# Altium PCB PCB_size.PcbDoc
Units mm, origin at the board's own origin, x right, y up, seen from the top; angles counter-clockwise.
Board outline 90.2 x 60.2 mm, 2 copper layers (Top Layer, Bottom Layer); 4 components, 0 nets, 4 pads, 0 vias.
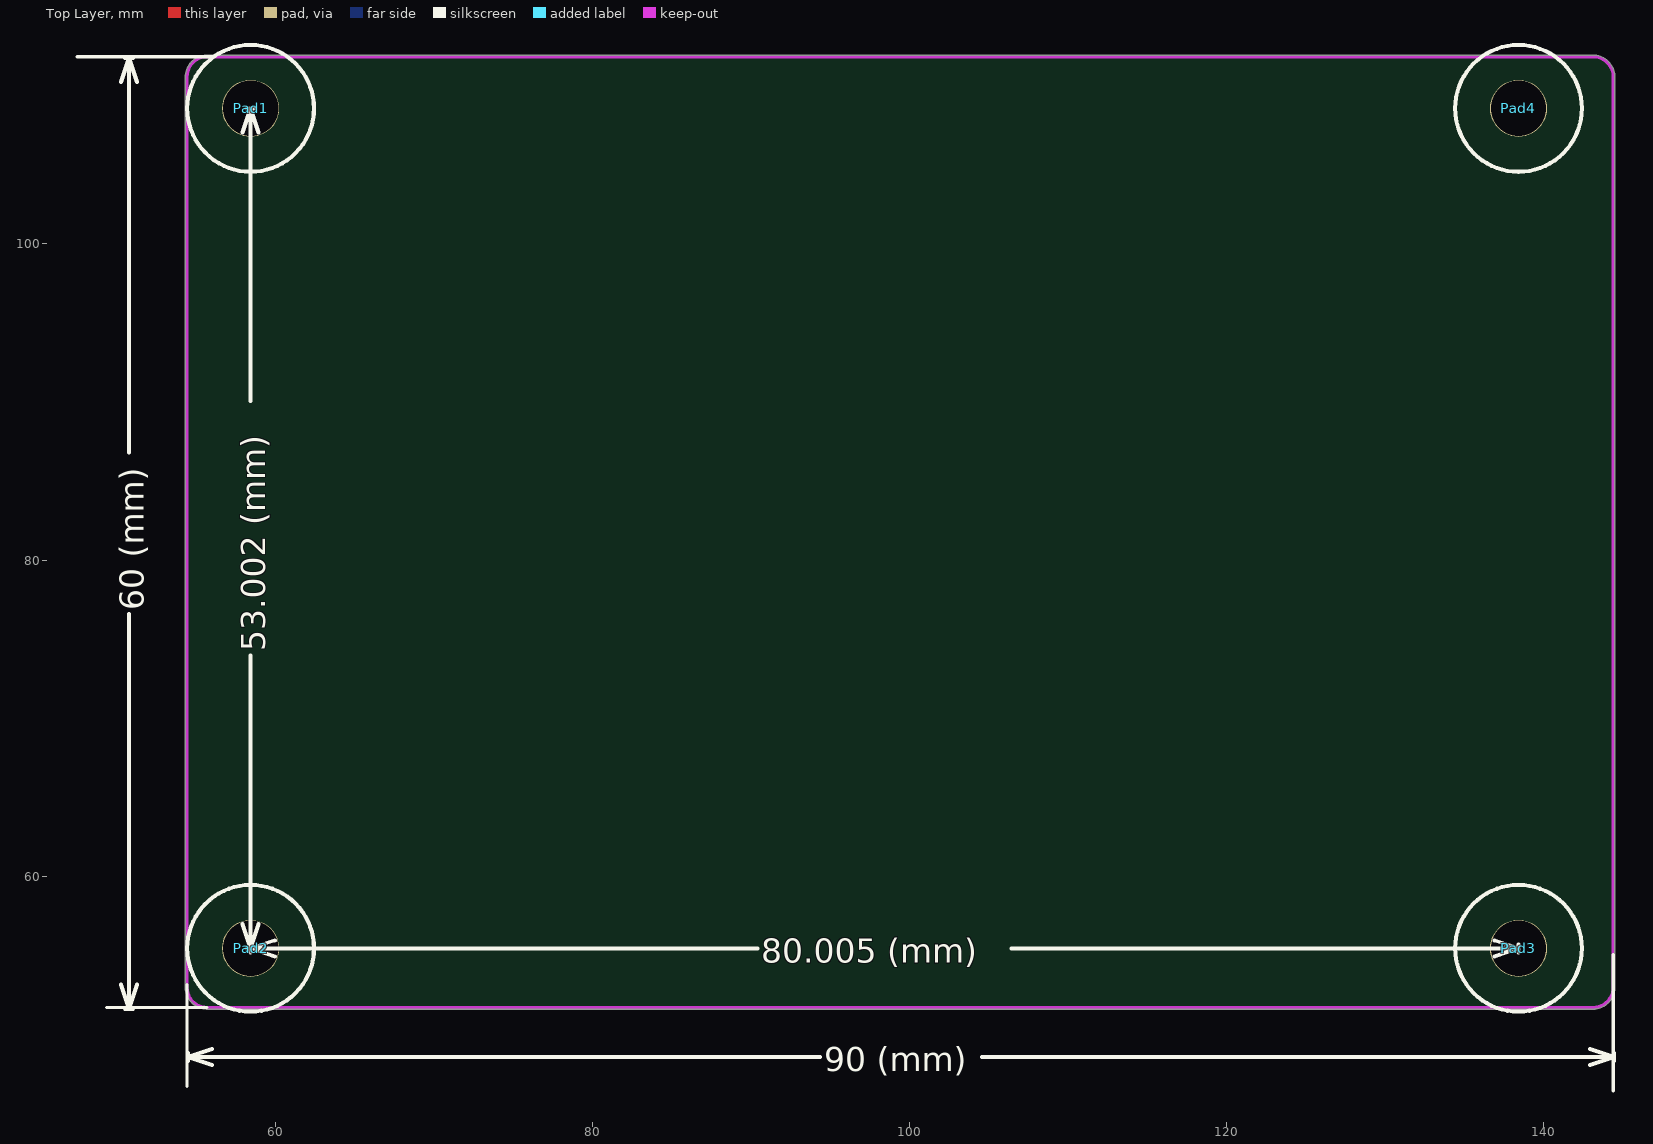
[diagram p0: Top Layer view]
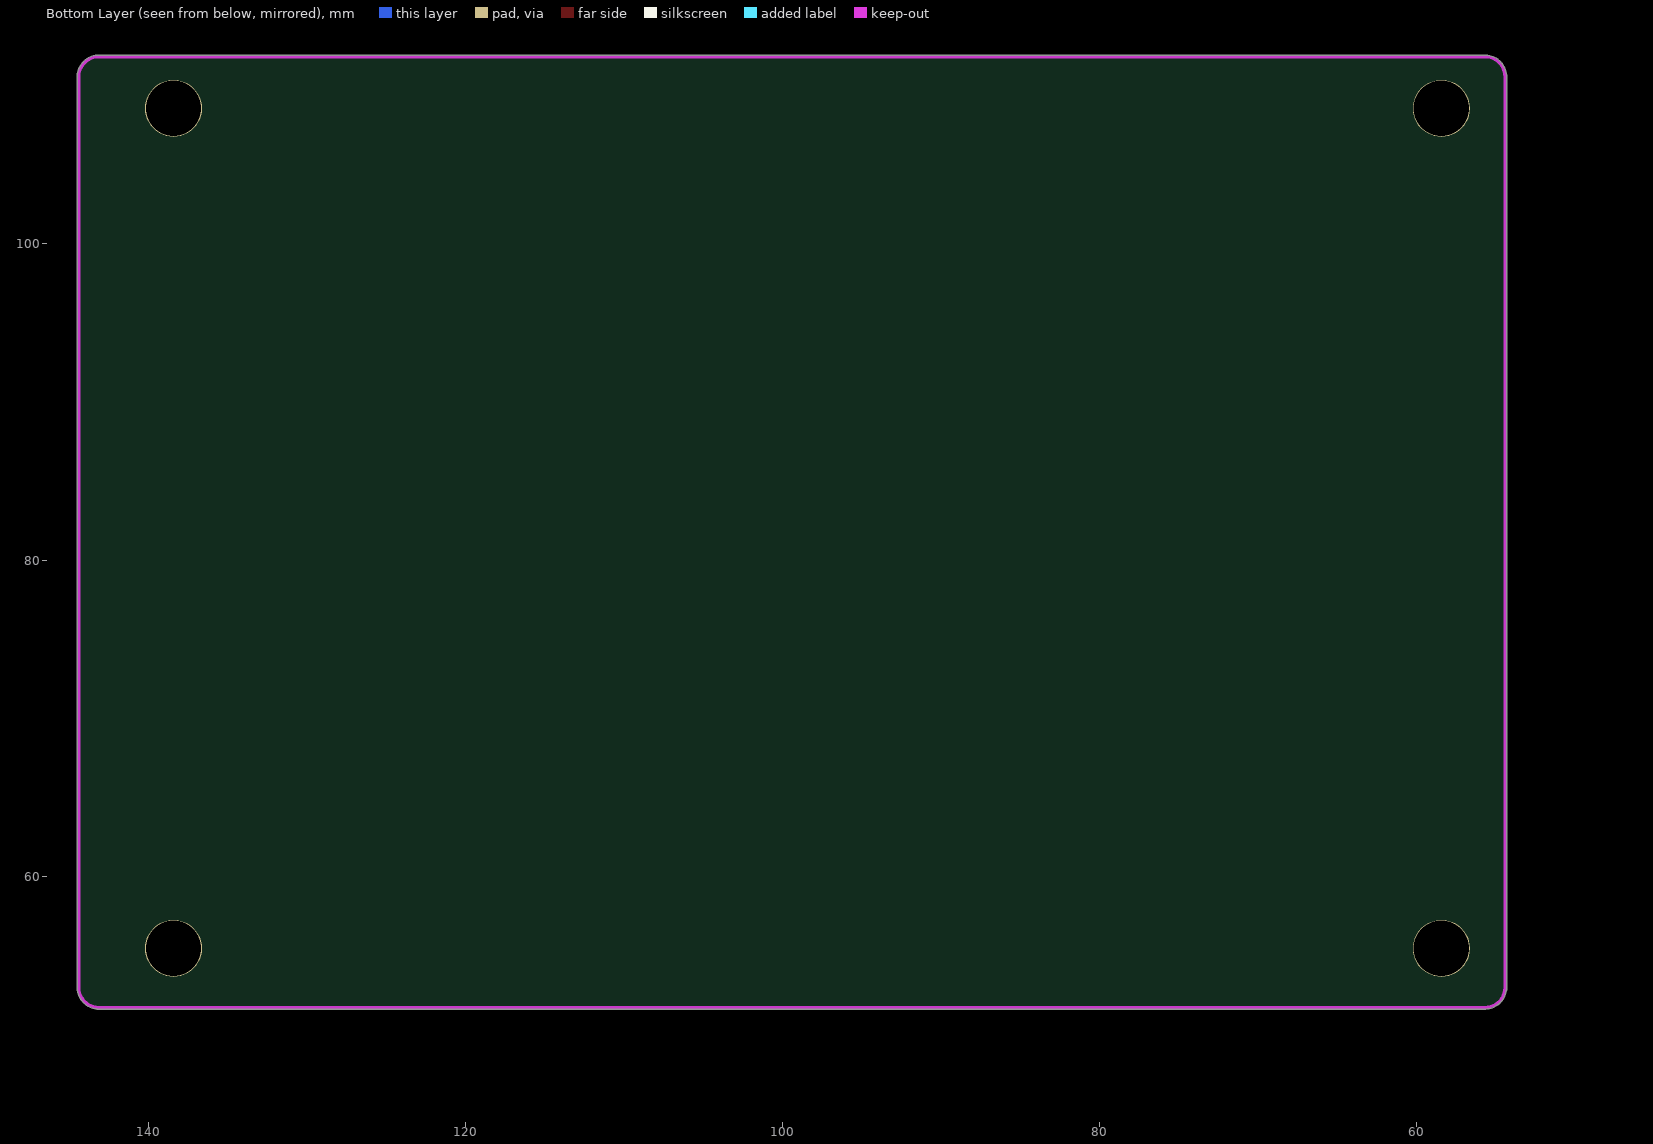
[diagram p1: Bottom Layer view, seen from below]

## Layer stack, top to bottom
Top Solder: solder mask 0.0102, Solder Resist, Dk 3.5
Top Layer: signal copper 0.0356
Dielectric 1: dielectric 0.32, FR-4, Dk 4.8
Bottom Layer: signal copper 0.0356
Bottom Solder: solder mask 0.0102, Solder Resist, Dk 3.5

## Board outline
54.332,52.883 54.332,110.566 cw(c54.432,110.566) 54.336,110.594 cw(c55.702,110.49) 55.53,111.849 cw(c55.575,111.76) 55.575,111.86 143.154,111.86 cw(c143.154,110.49) 144.523,110.558 cw(c144.432,110.515) 144.532,110.515 144.532,53.01 cw(c144.432,53.01) 144.523,52.968 cw(c143.154,53.035) 143.307,51.673 cw(c143.256,51.76) 143.256,51.66 55.702,51.66 cw(c55.702,51.76) 55.669,51.665 cw(c55.702,53.035) 54.347,52.829 cw(c54.432,52.883)

## Design rules (kind name [scope] priority, off if disabled: settings)
Clearance [All] p1: gap=0.254
PolygonConnect [All] p1: connectstyle=Relief reliefconductorwidth=0.254 reliefentries=4 polygonreliefangle="90 Angle" airgapwidth=0.254
RoutingVias [All] p1: holewidth=0.711 width=1.27 viastyle="Through Hole" minholewidth=0.711 minwidth=1.27 maxholewidth=0.711 maxwidth=1.27
SolderMaskExpansion [All] p1: expansion=0.102
Width [All] p1: maxlimit=0.254 minlimit=0.254 preferedwidth=0.254
29 further rules are at their usual default settings.

## Components (designator, comment, footprint, x,y, rotation, side; value= is the part's Value field where it differs from the comment)
Pad1 "Pad" pad35 58.42,108.501 r0 top
Pad2 "Pad" pad35 58.42,55.499 r0 top
Pad3 "Pad" pad35 138.425,55.499 r0 top
Pad4 "Pad" pad35 138.425,108.501 r0 top

## Footprints (in the part's own frame and the unit in brackets; to place one, negate y for a bottom-side part, rotate by r counter-clockwise, add the part's x,y. Pads: shape width x height; smd on the part's side, far side on the other; paste and mask are expansions set on the pad)
pad35 [mm]
  round 3.6 hole 3.5: 1(0.025,0)
  silkscreen extent -3.97,-4 4.03,4

## Nets (pads, with @x,y where several pads share a name; then routed paths per layer and width w, separated by ;. In a path a pad name is that pad's centre, name@x,y a point inside that pad or via, vN(x,y) a via of type N, cw(c..) or ccw(c..) an arc to the next point about the centre after c; other vN are vias at no path point)
pads on no net: Pad1.1 Pad2.1 Pad3.1 Pad4.1

## Keep-outs
Keep-Out Layer:
  lines w0.2: 54.432,52.883 54.432,110.566 ; 54.432,53.035 ccw(c55.702,53.035) 55.702,51.765 ; 54.432,110.49 cw(c55.702,110.49) 55.702,111.76 ; 55.575,111.76 143.154,111.76 ; 55.702,51.76 143.256,51.76 ; 142.977,111.76 143.154,111.76 ; 143.154,51.765 ccw(c143.154,53.035) 144.424,53.035 ; 144.424,110.439 144.424,110.49 ccw(c143.154,110.49) 143.154,111.76 ; 144.432,53.01 144.432,110.515

## Silkscreen, mask and mechanical layers (free items; w line width, h text height)
Top Overlay:
  lines w0.2: 47.498,111.76 56.007,111.76 ; 49.347,51.76 55.702,51.76 ; 54.432,46.787 54.432,53.213 ; 144.432,46.515 144.432,55.118
  lines w0.254: 50.267,53.209 50.775,51.685 ; 50.267,110.161 50.775,111.685 ; 50.521,51.685 51.029,51.685 ; 50.521,111.685 51.029,111.685 ; 50.775,76.581 50.775,51.685 ; 50.775,86.789 50.775,111.685 ; 51.283,53.209 50.775,51.685 ; 51.283,110.161 50.775,111.685 ; 54.483,48.387 54.483,48.895 ; 56.007,48.133 54.483,48.641 ; 56.007,49.149 54.483,48.641 ; 57.937,57.023 58.445,55.499 ; 57.937,106.977 58.445,108.501 ; 58.191,55.499 58.699,55.499 ; 58.191,108.501 58.699,108.501 ; 58.445,55.245 58.445,55.753 ; 58.445,73.976 58.445,55.499 ; 58.445,90.024 58.445,108.501 ; 58.953,57.023 58.445,55.499 ; 58.953,106.977 58.445,108.501 ; 59.969,54.991 58.445,55.499 ; 59.969,56.007 58.445,55.499 ; 90.424,55.499 58.445,55.499 ; 94.379,48.641 54.483,48.641 ; 104.587,48.641 144.483,48.641 ; 106.472,55.499 138.45,55.499 ; 136.926,54.991 138.45,55.499 ; 136.926,56.007 138.45,55.499 ; 138.45,55.245 138.45,55.753 ; 142.959,48.133 144.483,48.641 ; 142.959,49.149 144.483,48.641 ; 144.483,48.387 144.483,48.895
  text "60 (mm)" at 51.689,76.835 h1.52 r90
  text "53.002 (mm)" at 59.36,74.23 h1.52 r90
  text "80.005 (mm)" at 90.678,54.584 h1.52
  text "90 (mm)" at 94.633,47.727 h1.52